# Altium PCB 主控板0415 .PcbDoc (part 2 of 3)
Units mil, origin at the board's own origin, x right, y up, seen from the top; angles counter-clockwise.
Board outline 9048 x 3931 mil, 2 copper layers (Top Layer, Bottom Layer); 421 components, 239 nets, 1182 pads, 360 vias.
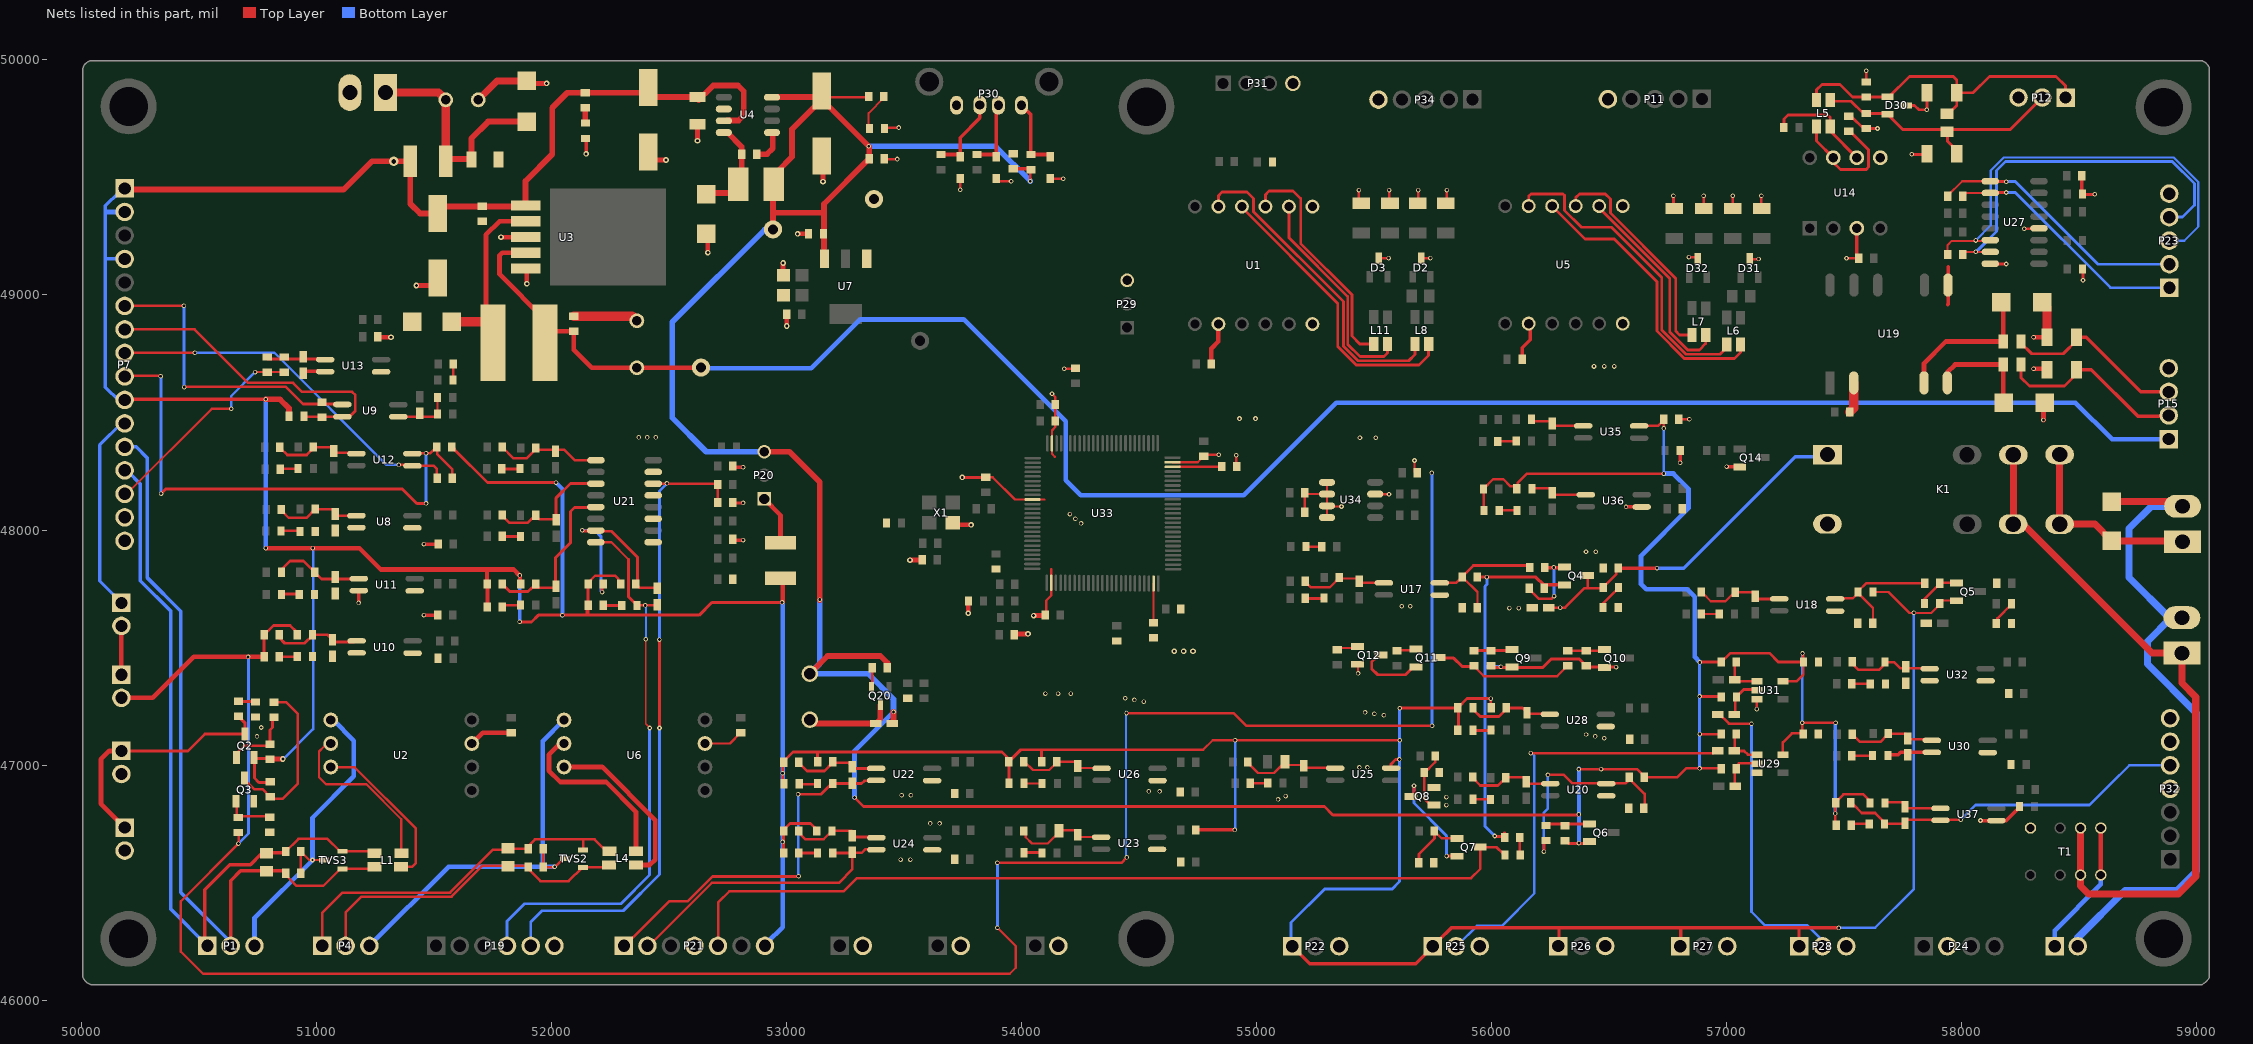
[diagram p2: the nets of this part, all layers, seen from the top]

## Via types
v1: diameter 19, hole 11.81, Top Layer to Bottom Layer, 133 vias
v2: diameter 19, hole 12, Top Layer to Bottom Layer, 130 vias
v3: diameter 20, hole 10, Top Layer to Bottom Layer, 67 vias
v4: diameter 24, hole 12, Top Layer to Bottom Layer, 29 vias
v5: diameter 40, hole 20, Top Layer to Bottom Layer, 1 vias

## Nets (pads, with @x,y where several pads share a name; then routed paths per layer and width w, separated by ;. In a path a pad name is that pad's centre, name@x,y a point inside that pad or via, vN(x,y) a via of type N, cw(c..) or ccw(c..) an arc to the next point about the centre after c; other vN are vias at no path point) (continued)
5V: B1.2 C18.1 C19.2 C24.1 C62.1 C64.1 C87.2 C92.1 C95.2 D111.1 L3.2 P20.3 Q6.2 R15.2 R100.2 R103.1 R165.2 R168.2 R171.2 R174.2 R184.1 R202.2 R204.2 R205.2 R206.2 R208.2 R209.2 TP3.1 U4.4 U7.3 U29.5 U31.5 U35.4 | length 15733.7
  Top Layer w9.94: C18.1@53187,49841 R15.2@53341,49841 ; U31.5@57255,47356 57298,47356 57327,47385 C64.1@57327,47439
  Top Layer w10.94: R205.2@55966,48088 55966,48175 56007,48216 56050,48216 56079,48187 R202.2@56102,48187 ; R202.2@56111,48171 56111,48200 56151,48240 v2(56733,48240) ; v2(56371,46982) 56620,46982 56654,46948 56790,46948 56829,46987 56882,46987 R168.2@56975,46987 ; U35.4@56640,48444 56710,48444 C92.1@56736,48470 ; v2(56733,48432) C92.1@56733,48460 ; v2(56886,47132) R165.2@56972,47132 ; U29.5@57239,47051 57239,47096 57278,47135 57321,47135 57322,47136 v2@57322,47173 ; v2(57322,47180) v2(57464,47180) ; R209.2@57462,46754 R208.2@57462,46846 ; R208.2@57467,46845 57497,46875 57582,46875 57605,46852 R206.2@57605,46846
  Top Layer w11.36: v3(54038,49484) R184.1@54038,49531.5
  Top Layer w11.94: C19.2@53361,49566 C19.2@53361,49569 ; v2(56885,47292) R174.2@56978,47292 ; v2@56889,47439 56979,47439 57016,47476 57182,47476 57220,47438 C64.1@57313,47438
  Top Layer w12.94: v2(53290,46862) 53328,46824 55289,46824 55325,46788 v2@56374,46788 ; R100.2@56327,46667 Q6.2@56407,46667 ; C64.1@57325,47436 v1@57325,47475
  Top Layer w15: C87.2@53965,49537.5 54036.5,49537.5 R184.1@54040.5,49533.5
  Top Layer w23.94: P20.3@52906,48333 53013,48333 53142,48204 v1@53142,47702 ; TP3.1@52943,49279 52943,49350 ; L3.2@52946,49471 52943,49468 52943,49350 ; U4.4@52951,49842 C18.1@53137,49842 ; L3.2@52962,49526 53024,49588 53024,49705 C18.1@53123,49804 ; B1.2@53100,47389 53175,47464 53400,47464 53430,47434 C95.2@53430,47414 ; 53160,49200 53160,49387 C19.2@53348,49575 ; 53160,49352 53158,49350 52943,49350 ; C18.1@53161,49813 53170,49813 53352,49631 C19.2@53352,49576 ; D111.1@53451,47177 53456,47182 v2(53456,47226)
  Bottom Layer w10.94: v2(57322,47180) 57322,47472 v1@57325,47475
  Bottom Layer w11.36: v2(56733,48240) v2(56733,48432)
  Bottom Layer w12.36: v2(56885,46986) v2@56885,47437
  Bottom Layer w15.36: v2(56372,46668) v2@56372,46987 ; v2(57462,46794) v2@57462,47180
  Bottom Layer w20: v2(53290,46862) 53290,47060 v2(53456,47226) ; v2(56733,48240) 56774,48240 56838,48176 56838,48092 56636,47890 56636,47770 56658,47748 56832,47748 56864,47716 56864,47460 56886,47438 v2(56886,47437)
  Bottom Layer w23.94: P20.3@52906,48333 52659,48333 52514,48478 52514,48884 52909,49279 TP3.1@52943,49279 ; v1(53142,47704) 53142,47431 B1.2@53100,47389 53347,47389 53456,47280 v2(53456,47226) ; v3(53350,49632) 53890,49632 v3(54038,49484)
  other v1: 57323,47475
  other v2: 56371,46790 56466,46983
24V_IN: C3.1 C4.1 D1.1 F1.2 P2.1 | length 980.9
  Top Layer w25: C3.1@51550,49828 C3.1@51551,49827 ; F1.2@51552,49578 C4.1@51648,49578 ; C4.1@51660,49576 51660,49666 51731.39,49737.39 D1.1@51896,49737.39
  Top Layer w35: P2.1@51294,49861 51520.1,49861 C3.1@51551.1,49830 ; F1.2@51551,49569 C3.1@51551,49827
485_A: C40.2 D6.1 D30.2 L5.4 P12.2 R62.2 | length 1109.4
  Top Layer w12: L5.4@57441,49829 57446,49824 57530,49824 57582,49772 D30.2@57665.23,49772 ; D30.2@57684.63,49768.6 57749.23,49704 R62.2@57940.24,49704 ; D6.1@57979,49600 57979,49615 57940.24,49653.76 R62.2@57940.24,49704 ; P12.2@58343,49840 58207,49704 R62.2@57940.24,49704
485_B: C36.2 D5.1 D30.1 L5.3 P12.1 R62.1 | length 1435.2
  Top Layer w12: L5.3@57383,49830 57383,49873 57406,49896 57482,49896 57536,49842 C36.2@57594,49842 57683.23,49842 D30.1@57684.63,49843.4 57691.4,49843.4 57778,49930 57964,49930 57979,49915 D5.1@57979,49860 ; R62.1@57940.24,49768 57979,49806.75 D5.1@57979,49860 ; P12.1@58442,49840 58442,49890 58402,49930 58118,49930 58048,49860 D5.1@57979,49860
+12V: C12.2 C13.1 L2.2 P15.1 TP2.1 U3.4 | length 8374.7
  Top Layer w20: U3.4@51891,49179.75 51791.75,49179.75 51780,49168 51780,49088 51973,48895 L2.2@51973,48797 52022,48846 C12.2@52096,48846 52096,48766 52172,48690 C13.1@52364,48690 TP2.1@52636,48690
  Bottom Layer w20: TP2.1@52636,48690 TP2.1@52637,48691 ; TP2.1@52640,48688 53106,48688 53314,48896 53754,48896 54188,48462 54188,48212 54252,48148 54946,48148 55340,48542 58484,48542 58640,48386 58880,48386 P15.1@58881,48387
+24V: C10.1 C11.1 C17.1 C20.1 F1.1 F2.2 P7.1 P7.2 P7.4 P7.10 P21.7 P22.1 P25.1 P26.1 P27.1 P28.1 Q2.2 Q4.2 Q5.2 Q9.2 Q10.2 R1.2 R32.1 R44.1 R51.1 R52.2 R75.1 R77.1 R89.1 R90.1 R113.2 R114.2 R116.2 R117.2 R118.2 R120.2 R121.2 R124.2 R125.1 R127.2 R129.2 R132.2 R134.2 R135.1 R138.2 R140.2 R141.2 R145.2 R148.2 R151.2 R157.2 R158.2 U3.1 U4.7 U25.4 | length 24997.6
  Top Layer w9.94: 54309,47065 54773,47065 54814,47106 v1(54909,47106) v1(55610,47106) ; R89.1@57634,47736 57689,47736 57778,47647 57871,47647 R90.1@57909,47685 ; R90.1@57915,47700 Q5.2@57967,47700
  Top Layer w10.94: R120.2@52156,47684 52156,47775 52187,47806 52270,47806 52285,47791
  Top Layer w11.94: R44.1@51589,48344 51589,48341 51728,48202 v2@52022,48202 ; R127.2@52985,46927 52985,47013 53028,47056 53917,47056 53943,47030 R140.2@53943,47020 ; R134.2@52988,46644 52988,46725 53015,46752 53103,46752 R129.2@53132,46723 ; R121.2@53132,47020 53132,47050 ; R140.2@53946,47014 53997,47065 54035,47065 54309,47065 ; R141.2@53947,46919 R140.2@53947,47026 ; R138.2@54086,47022 54086,47062 ; R148.2@55857,47244 55896,47283 v2(55997,47283) R145.2@55997,47246
  Top Layer w12.36: U25.4@55573,46987 55573,47005 55592,47024 v1(55608,47024) ; v3@56012,46696 R135.1@56055,46696
  Top Layer w12.94: Q2.2@50737,47021 50737,46945 50756,46926 R51.1@50803,46926 ; Q2.2@50738,47028 R52.2@50795,47028 ; v2@51868,47609 51916,47609 51945,47638 52629,47638 52683,47692 v1@52978,47692 ; v1@55613,47242 R148.2@55848,47242 ; R151.2@55859,47152 R148.2@55859,47229 ; R157.2@56016,47416 56219,47416 56255,47452 56372,47452 56407,47417 v1(56530,47417) ; P26.1@56287,46233 56287,46307 ; P27.1@56805,46249 56805,46303 ; P28.1@57309,46237 57309,46302
  Top Layer w13.94: P7.10@50178,48556 v1(50785,48556) ; P22.1@55170,46212 55227,46155 55678,46155 P25.1@55762,46239 ; R75.1@55955,47800 56189,47800 56222,47767 Q4.2@56298,47767
  Top Layer w14.94: P25.1@55776,46255 55828,46307 56287,46307 v1(57477,46307)
  Top Layer w15: R125.1@54742,46724 v1(54908,46724)
  Top Layer w15.75: 52154,47644 R120.2@52154,47681
  Top Layer w16.94: 51720,47832 51727,47825 R114.2@51727,47770 ; R116.2@51728,47688 R114.2@51728,47762 ; R113.2@51866,47789 v2@51866,47806
  Top Layer w20: v1@50788,47922 51184,47922 51274,47832 51840,47832 v2@51866,47806 ; R52.2@50810.5,47026 v4(50858,47026) ; F2.2@52975,47795 F2.2@52980,47790 ; v1@52984,47694 F2.2@52984,47792
  Top Layer w23.94: v1(50785,48556) 50846,48556 50884,48518 R32.1@50884,48484 ; R1.2@52144,49860 52407,49860 C20.1@52438,49829 ; C20.1@52439,49842 C17.1@52628,49842 ; C17.1@52627,49829 52675,49877 52689,49891 52794,49891 52818,49867 52818,49763 52797,49742 U4.7@52748,49742
  Top Layer w25: P7.1@50188,49448 51116,49448 51237,49569 F1.1@51400,49569 51400,49388 51441,49347 C11.1@51517,49347 ; C11.1@51537,49376 U3.1@51876,49376 ; U3.1@51891,49380 51891,49485 52004,49598 52004,49796 52068,49860 R1.2@52144,49860
  Bottom Layer w10.36: v1@57477,46305 v1(57477,46307) ; v1@57478,46308 57632,46308 57797,46473 v2(57797,47648)
  Bottom Layer w11.36: v4@50860,47026 50987,47153 v1@50987,47924 ; v1@54909,46722 v1(54909,47106)
  Bottom Layer w12.36: P22.1@55147,46254 55147,46330 55289,46472 55576,46472 55609,46505 v1@55609,47239
  Bottom Layer w13.36: 55975,47283 v2@55999,47283 ; v1(55980,47800) 55980,47768 55972,47760 55972,47418 ; v3@56016,46696 55972,46740 55972,47418 ; v2@56034,47418 55972,47418
  Bottom Layer w14.36: 50107,49154 P7.4@50186,49154 ; P7.10@50161,48550 50103,48608 50103,49379 P7.1@50161,49437
  Bottom Layer w16.36: v2@51866,47612 v2(51866,47807) ; v2@52022,48200 52047,48175 v2(52047,47637)
  Bottom Layer w19.36: 50110,49353 P7.2@50173,49353
  Bottom Layer w20: v1@50785,47924 v1@50785,48558 ; P21.7@52919,46246 52984,46311 v1@52984,47690
  other v1: 55610,47242 52982,47692 50785,47923 50985,47923
  other v2: 52984,46673 52984,46965 56040,47418 51865,47610 52020,48202
  other v3: 56014,46698
  other v5: 51330,49568
+24V_M: K1.3 K1.6 P6.1 T1.3 T1.6 | length 2996
  Top Layer w30: K1.3@58220,48320 58220,48026 K1.6@58219,48025 58261,48025 58810,47476 P6.1@58937,47476 58937,47349 58996,47290 58996,46526 58922,46452 58540,46452 58506,46486 T1.3@58506,46732
A+: P23.1 R146.1 U27.2 | length 1035.9
  Top Layer w9.36: R146.1@58005,49412 58005,49419 58019.86,49433.86 U27.2@58122,49433.86
  Top Layer w12: U27.2@58136,49436 v3@58184,49436
  Bottom Layer w12: v3@58194,49436 58228,49436 58633,49031 P23.1@58884,49031
  other v3: 58190,49436
A-: P23.2 R146.2 U27.1 | length 1100.4
  Top Layer w9.36: R146.2@57941,49412 57941,49423 58002,49484 U27.1@58122,49484
  Top Layer w12: U27.1@58146,49482 v3@58194,49482
  Bottom Layer w12: v3@58194,49482 58228,49482 58579,49131 P23.2@58883.75,49131
  other v3: 58190,49482
AGND_M: D47.2 P6.2 P13.2 P14.2 | length 2993.6
  Top Layer w30: D47.2@58638,48121 58920,48121 P13.2@58940,48101
  Bottom Layer w30: P14.2@58494,46229 58494,46265.44 58694.56,46466 58916,46466 59000,46550 59000,47220 58790,47430 58790,47526 58891,47627 P6.2@58937,47627 58883,47627 58712,47798 58712,48006 58807,48101 P13.2@58940,48101
B+: P23.3 R152.2 U27.6 | length 1841.9
  Top Layer w9.36: R152.2@57941,49172 57940,49173 57940,49212 57958,49230 57986,49230 58118.71,49230 U27.6@58122,49233.29
  Bottom Layer w9.36: v3(58060,49232) 58124,49296 58124,49529.59 58179.09,49584.68 58902.91,49584.68 59006.68,49480.91 59006.68,49290.68 58947,49231 P23.3@58883.5,49231
B-: P23.4 R152.1 U27.7 | length 1621.8
  Top Layer w9.36: R152.1@58005,49172 58016.14,49183.14 U27.7@58122,49183.14
  Bottom Layer w12: v3(58060,49184) 58062,49184 58148,49270 58148,49530 58186,49568 58896,49568 58990,49474 58990,49382 58939,49331 P23.4@58883.25,49331
BELL: C33.2 P7.9 R44.2 U12.4 | length 2238.6
  Top Layer w10.94: P7.9@50195,48656 v2@50336,48656 ; U12.4@51430,48326 51484,48326 51503,48345 R44.2@51513,48345 ; R44.2@51514,48342 51514,48323 51578,48259 C33.2@51578,48235
  Top Layer w12.94: v1(50340,48155) 50359,48174 51367,48174 51428,48113 v1(51467,48113)
  Bottom Layer w12.36: v1(51467,48113) v1(51467,48327)
  Bottom Layer w13.36: v2@50335,48652 50340,48647 v1(50340,48155)
  other v2: 50338,48654
"BELL COM": C33.1 P7.8 U12.3 | length 1499
  Top Layer w9.94: P7.8@50201,48754 v1(50484,48754)
  Top Layer w10.94: v1(51351,48277) U12.3@51401,48277 ; U12.3@51446,48273 51500,48273 51513,48260 C33.1@51513,48231
  Bottom Layer w9.94: v1(50484,48754) 50822,48754 51299,48277 v1(51351,48277)
"CAN1 H": C6.1 L1.1 P1.2 P7.12 R8.1 TVS3.1 | length 3295.9
  Top Layer w10: C6.1@50870,46540 50870,46532 50916,46486 51030,46486 51102.6,46558.6 TVS3.1@51110.99,46558.6 51239.6,46558.6 L1.1@51248,46567
  Top Layer w15: P1.2@50636,46231 50636,46508 50678,46550 50786,46550 R8.1@50792,46556 ; R8.1@50798,46550 C6.1@50864,46550
  Bottom Layer w15: P7.12@50185,48353.73 50234.27,48353.73 50282,48306 50282,47796 50424,47654 50424,46458 50636,46246 P1.2@50636,46231
"CAN1 L": C9.1 L1.2 P1.1 P7.13 R8.2 TVS3.2 | length 3183.2
  Top Layer w10: C9.1@50870,46632 50924,46686 51048,46686 51100.6,46633.4 TVS3.2@51110.99,46633.4 51239.6,46633.4 L1.2@51248,46625
  Top Layer w15: P1.1@50526,46266 50526,46470 50632,46576 50720,46576 50764,46620 R8.2@50792,46620 ; R8.2@50802,46626 C9.1@50868,46626
  Bottom Layer w15: P7.13@50198,48250 50252,48196 50252,47784 50382,47654 50382,46386 P1.1@50537,46231
"CAN2 H": C22.1 L4.3 P4.2 R20.2 TVS2.1 | length 1391.4
  Top Layer w10.94: P4.2@51125,46231 51125,46372 51193,46440 51575.95,46440 51707.95,46572 R20.2@51820,46572 ; R20.2@51834,46572 51896,46572 C22.1@51902,46566 51902,46558 51954,46506 52074,46506 52132.6,46564.6 TVS2.1@52134.99,46564.6 52235.6,46564.6 L4.3@52246,46575
"CAN2 L": C27.1 L4.4 P4.1 R20.1 TVS2.2 | length 1556.6
  Top Layer w10.94: P4.1@51026,46231 51026,46372 51110.94,46456.94 51568.94,46456.94 51752,46640 51816,46640 R20.1@51822,46634 ; R20.1@51834,46636 51842,46644 C27.1@51902,46644 51902,46656 51930,46684 52184,46684 52228.6,46639.4 52240.6,46639.4 L4.4@52247,46633 ; TVS2.2@52134.99,46639.4 52134.99,46682.99 52136,46684
CANG_1: C6.2 C9.2 P1.3 TVS3.3 U2.8 | length 1388.6
  Top Layer w10: C6.2@50934,46540 C9.2@50934,46632 50970,46596 TVS3.3@51033.01,46596
  Bottom Layer w20: P1.3@50737,46231 50737,46349 v3(50984,46596) 50984,46776 51160,46952 51160,47104 51072,47192 U2.8@51062,47192
CANG_2: C22.2 C27.2 P4.3 TVS2.3 U6.8 | length 1786.8
  Top Layer w10.94: C27.2@51966,46644 C22.2@51966,46566 52016,46566 52052,46602 TVS2.3@52057.01,46602
  Bottom Layer w20: P4.3@51226,46231 51563,46568 51964,46568 51964,47102 U6.8@52054,47192 ; 51950,46568 v3(52014,46568)
EMC-: P7.11 P8.1 | length 835.7
  Bottom Layer w13.36: P8.1@50164,47698 50079,47783 50079,48362 50172,48455 P7.11@50177,48455
EXPOSE: D81.2 P21.5 Q7.3 | length 3656
  Top Layer w10.94: P21.5@52711,46258 52711,46417 52757,46463 53244,46463 53300,46519 55913,46519 55952,46558 Q7.3@55952,46651
  Top Layer w11.94: Q7.3@55953,46654 55957,46650 56022,46650 D81.2@56046,46626
FAULT: D78.2 D79.2 P21.2 U24.2 | length 1250.9
  Top Layer w10.94: P21.2@52403,46227 52410.61,46227 52682.61,46499 53223,46499 53281,46557 D78.2@53281,46622 ; D79.2@53197,46626 53281,46626 53282,46627 53321,46627 53335,46641 U24.2@53362,46641
FAULT1: C30.2 P7.7 R32.2 U9.4 | length 1377.7
  Top Layer w10.94: P7.7@50201,48854 50482,48854 50710,48626 50902,48626 50940,48588 51152,48588 51166,48574
  Top Layer w12: R32.2@50948,48484 50950,48482 U9.4@51111,48482 51142,48482 51166,48506 51166,48574
"FAULT1 COM": C30.1 P7.6 U9.3 | length 1284.2
  Top Layer w10.94: P7.6@50187,48954 v1(50437,48954) ; v1@50438,48609 50871,48609 50944,48536 U9.3@51094,48536
  Bottom Layer w12.36: v1(50438,48608) v1@50438,48956
FDP_ENABLE: D106.2 D107.2 P32.5 R208.1 U37.2 | length 1482.6
  Top Layer w10.94: R208.1@57539,46832 57575,46796 57632,46796 57677,46751 D106.2@57751,46751 ; D106.2@57758,46767 57899,46767 57976,46767 ; v1@57989,46767 57976,46767 ; v1@57995,46767 57976,46767
  Bottom Layer w10.94: v1(57996,46767) 58059,46830 58544,46830 58634,46920 58713,46999 P32.5@58887,46999
FLOOUT: D72.2 D73.2 P19.4 U21.8 | length 2385
  Top Layer w7.36: v2(52402,47535) 52402,47175 v3(52419,47158)
  Top Layer w8.94: U21.8@52209,47948 52256,47948 52328,47876
  Top Layer w11.94: 52328,47876 52328,47716 52364,47680 D73.2@52443,47680
  Bottom Layer w7.36: v2@52403,47536 v2@52403,47682
  Bottom Layer w12: P19.4@51811.8,46231 51811.8,46335.8 51886,46410 52296,46410 52418,46532 v3@52418,47156
  other v2: 52400,47679
FLOSY: C53.2 P19.5 R110.2 U21.14 | length 2756.4
  Top Layer w10.36: U21.14@52450,48196 R110.2@52717,48196 ; C53.2@52708,48122 R110.2@52708,48205
  Top Layer w12: v2@52458,47532 52460,47530 v3(52460,47158)
  Bottom Layer w12: P19.5@51912.4,46231 51912.4,46332 51960.4,46380 52306,46380 52460,46534 v3@52460,47156 ; v2(52460,47534) 52460,48166 v2(52492,48198)
FOREWARD: D89.1 P25.2 | length 1798.3
  Top Layer w10.94: v2@56169,47050 D89.1@56943,47050
  Bottom Layer w10.36: P25.2@55856,46234 55938,46316 56044,46316 56182,46454 56182,47040 v2@56167,47055
  other v2: 56167,47051
FPD_BOTT: D94.1 P28.2 | length 1343.6
  Top Layer w10.94: D94.1@56959,47222 56964,47222 57010,47176 v1(57106,47176)
  Bottom Layer w10.94: v1(57106,47176) 57106,46556 57106,46376 57164,46318 57344,46318 57408,46254 P28.2@57408,46229
GND: C1.2 C2.1 C3.2 C4.2 C5.2 C7.1 C8.1 C10.2 C11.2 C12.1 C13.2 C15.2 C17.2 C18.2 C19.1 C20.2 C24.2 C25.1 C29.1 C31.1 C32.1 C34.2 C35.2 C37.1 C41.1 C46.1 C47.1 C48.1 C50.1 C51.1 C52.1 C53.1 C54.1 C55.1 C56.1 C57.1 C58.1 C59.1 C60.2 C61.1 C62.2 C63.1 C64.2 C65.1 C66.2 C67.2 C69.2 C75.1 C80.1 C81.1 C82.2 C83.1 C84.1 C85.1 C86.1 C87.1 C88.2 C90.2 C91.2 C92.2 C93.1 C94.1 C95.1 D1.2 D4.2 D8.2 D9.2 D10.2 D16.2 D18.2 D19.2 D21.2 D22.2 D24.2 D25.2 D28.2 D35.1 D36.1 D46.2 D48.2 D56.2 D58.2 D61.1 D63.1 D95.2 D96.2 D99.2 D100.2 D101.2 K1.8 L9.1 P2.2 P7.15 P7.16 P9.2 P10.2 P15.4 P16.2 P17.2 P18.2 P19.6 P21.4 P22.3 P23.5 P24.2 P25.3 P26.3 P27.3 P28.3 P29.3 P30.1 P31.4 P32.4 P32.6 P32.7 Q3.2 Q8.2 Q12.2 Q14.2 Q20.2 R55.2 R142.1 R144.1 R147.1 R154.1 R179.2 R181.2 R193.1 R194.2 R199.1 T1.1 TP5.1 U1.2 U1.6 U2.2 U3.3 U3.5 U4.6 U5.2 U5.6 U6.2 U7.1 U8.2 U8.3 U10.2 U10.3 U11.2 U11.3 U13.2 U13.3 U14.3 U17.3 U18.3 U19.2 U19.5 U20.3 U21.9 U21.11 U21.13 U21.15 U22.3 U23.3 U24.3 U26.3 U27.8 U27.12 U28.3 U29.3 U30.3 U31.3 U32.2 U32.3 U33.10 U33.27 U33.74 U33.99 U34.1 U34.2 U34.3 U34.4 U34.7 U36.3 U37.3 X1.2 | length 5940.5
  Top Layer w9.36: C67.2@54792,48320 v3(54840,48320) ; C82.2@54914,48270 v3(54914,48318) ; U34.3@55314,48100 v3(55362,48100) ; U34.7@55516,48152 v3(55564,48152) ; C88.2@55672,48248 v3(55672,48296)
  Top Layer w9.94: v2@55432,47392 Q12.2@55432,47430
  Top Layer w10: U6.2@52654,47092 52760,47092 C15.2@52806,47138 ; Q20.2@53362.6,47332.99 53366,47336.39 C95.1@53366,47414 ; v4@53748,48222 v4@53750,48224 ; C81.1@53852,48224 53878,48224 53972.21,48129.79 U33.10@54047.25,48129.79 54097.79,48129.79 54098,48130 ; C86.1@54106,47642 54106,47700 54127.22,47721.22 U33.27@54127.22,47775.64 54127.22,47832.78 54126,47834 ; v3(54130,48580) 54144,48566 C66.2@54144,48534 C66.2@54150,48528 ; 54142,48312 54129.84,48324.16 U33.99@54129.84,48368.41 54129.84,48423.84 54144,48438 C69.2@54144,48478 ; C69.2@54144,48480 C66.2@54144,48524 ; v3(54182,48686) 54228,48686 R179.2@54230,48688 ; U33.74@54642.84,48288.44 54750.44,48288.44 C67.2@54776,48314 ; C91.2@55205,48076 55206,48077 C90.2@55206,48158 55211,48153 U34.2@55300,48153 ; U34.4@55300,48053 U34.1@55300,48203
  Top Layer w10.94: C92.2@56810,48472 v2@56838,48472 ; v2@57128,47245 U31.3@57128,47282
  Top Layer w11.36: C19.1@53424.5,49578 v3(53472,49578) ; D9.2@53430.5,49712 v3(53478,49712) ; v3(53740,49448) D101.2@53740,49495.5 ; 53908.5,49484 v3(53956,49484) ; D99.2@54130.5,49494 v3(54178,49494)
  Top Layer w12: v4@53750,48224 C81.1@53848,48224 ; v3@57508,49156 C35.2@57556,49156 ; U27.8@58144,49132 v3@58192,49132 ; v3@58264,49282 U27.12@58312,49282 ; v3@58516,49060 R154.1@58516,49108 ; R147.1@58518,49428 v3(58566,49428)
  Top Layer w14.36: C54.1@52784,47957 v2(52816,47957) ; C53.1@52784,48115 v2(52816,48115) ; C52.1@52784,48267 v2(52816,48267)
  Top Layer w15: D25.2@50950,48676 U13.2@51036,48676 ; v1(51180,47690) U11.2@51180,47745 ; v1(51458,47638) C32.1@51513,47638 ; v1(51458,47940) C29.1@51513,47940 ; D4.2@52146,49666 52148,49664 v4(52148,49600) ; C37.1@56130,48726 56130,48776 56164,48810 56164,48872 U5.2@56158,48878 ; v1(56572,48098) 56627,48098 U36.3@56628,48097 ; v1(56802,48286) R199.1@56802,48341 ; v1(57000,48270) 57055,48270 Q14.2@57056,48269 ; U14.3@57554,49284 57554,49164 C35.2@57562,49156 ; 57940,48958 57942,48960 U19.5@57942,49042 57942,49120 ; v3@58080,46762 58082,46764 U37.3@58148,46764 58190,46764 58246,46820 C94.1@58246,46824 ; C60.2@58511,49507 58511,49433 R147.1@58514,49430
  Top Layer w20: C34.2@51270.5,48820 v4(51318,48820) ; v4(51426,49040) C11.2@51488,49040 ; U2.2@51662,47092 51708,47138 C1.2@51830,47138 ; v4(51786,49246) U3.3@51833.5,49246 ; v4(51896,49048) U3.5@51896,49095.5 ; D1.2@51932.5,49900 v4(51980,49900) ; C20.2@52440.5,49574 v4(52488,49574) ; v4(52622,49656) 52622,49703.5 ; v4(52666,49180) D10.2@52666,49227.5 ; C7.1@52986,49088.5 v4(52986,49136) ; v4(53002,48868) C25.1@53002,48915.5 ; v4(53048,49260) C24.2@53095.5,49260 ; v4(53156,49482) C18.2@53156,49529.5 ; v4(53526,47872) C83.1@53573.5,47872 ; X1.2@53738.5,48022 v4(53786,48022) ; v4(53774,47646) L9.1@53774,47693.5 ; C75.1@53980.5,47558 v4(54028,47558) ; v4(54052,47636) C86.1@54099.5,47636 ; C2.1@54808,48706 54808,48772 54838,48802 U1.2@54838,48876 ; v2(58306,48686) D36.1@58359,48686 ; v2(58306,48820) D35.1@58359,48820 ; v2(58348,48468) D63.1@58348,48521
  Top Layer w30: C3.2@51688.9,49830 51769.51,49910.61 D1.2@51896,49910.61
  Top Layer w40: C12.1@52096,48910 52344,48910 C13.2@52364,48890 ; C48.1@57524,48502 57541,48519 U19.2@57541,48626 ; D61.1@58342.61,48968 58363,48947.61 D35.1@58363,48820 ; D36.1@58359,48686 D36.1@58363,48682
  other v1: 53486,46598 53528,46598 53612,46752 53652,46752 55808,46830 55092,46854 55808,46864 55124,46868 53490,46872 53530,46872 54542,46888 54588,46888 55438,46990 55472,46990 56480,47114 50748,47122 56441,47122 56402,47130 55542,47212 55502,47218 55462,47224 54520,47270 54481,47277 54442,47284 54102,47304 54156,47304 54210,47304 56076,47668 56116,47668 55618,47676 55654,47676 52372,48394 52408,48394 52444,48394
  other v2: 57128,47238 55432,47390 54254,48028 54230,48048 54206,48068 56842,48471
  other v3: 58080,46764 50766,47160 56402,47908 56444,47908 55440,48392 55508,48392 54928,48474 54996,48474 56436,48696 56479,48696 56522,48696 58516,49062 58190,49132 57510,49156 58266,49282
  other v4: 54650,47484 54690,47484 54730,47484 53748,48224
GND_422_1: D15.2 D29.2 D31.3 D32.3 D33.2 D34.2 P11.5 U5.7 | length 208
  Top Layer w10.94: D29.2@56774,49386 v2@56774,49424 ; v2(56840,49161) D32.3@56868,49161 ; D15.2@56902,49384 v2(56902,49422) ; D33.2@57026,49380 v2@57026,49418 ; D31.3@57104,49152 v2@57132,49152 ; D34.2@57148,49382 v2@57148,49420
  other v2: 57136,49153 56774,49422 57026,49422 57148,49422
GND_422_2: D2.3 D3.3 D7.2 D11.2 D12.2 D14.2 P34.5 U1.7 | length 208
  Top Layer w10.94: D11.2@55436,49410 v2@55436,49448 ; 55534,49157 v2(55562,49157) ; D7.2@55564,49408 v2(55564,49446) ; D12.2@55688,49404 v2@55688,49442 ; D2.3@55712,49157 v2(55740,49157) ; D14.2@55810,49406 v2@55810,49444
  other v2: 55436,49446 55688,49446 55810,49446
GND_485: C36.1 C40.1 D5.2 D6.2 D30.3 P12.3 R67.2 U14.5 | length 382
  Top Layer w12: R67.2@57520,49756 57534,49756 57582,49708 C40.1@57594,49708 v3(57642,49708) ; C36.1@57594,49906 v3(57594,49954) ; D30.3@57763.37,49806 57800,49806 57818,49788 v3(57852,49788) D5.2@57852,49836 ; v3(57788,49598) D6.2@57836,49598
HAND_PRE: P7.14 R43.1 R48.1 | length 915.3
  Top Layer w9.94: P7.14@50185,48153.87 50193.87,48153.87 50556,48516 v1(50638,48516) ; v1(50740,48672) R48.1@50782,48672 ; R48.1@50792,48672 R43.1@50864,48672
  Bottom Layer w9.94: v1(50638,48516) 50638,48570 v1(50740,48672)
KV85: D74.2 D76.2 P21.1 U22.2 | length 1542.5
  Top Layer w10.94: P21.1@52336,46241 52336,46255 52501,46420 52579.66,46420 52685.66,46526 v2@53051,46526
  Top Layer w11.94: v2(53050,46876) 53148,46876 D76.2@53197,46925 ; D76.2@53193,46921 53320,46921 53332,46933 U22.2@53375,46933
  Bottom Layer w11.36: v2@53050,46529 v2(53050,46876)
  other v2: 53052,46527
LCD_RX: D35.2 P15.3 R97.1 | length 786.9
  Top Layer w12: R97.1@58252,48802 58252,48796 58298,48750 58432,48750 58489,48807 D35.2@58489,48820
  Top Layer w15: D35.2@58489,48820 58530,48820 58762.33,48587.67 P15.3@58881,48587.67
LCD_TX: D36.2 P15.2 R98.1 | length 823.4
  Top Layer w12: R98.1@58252,48704 58252,48648 58288,48612 58438,48612 58489,48663 D36.2@58489,48682
  Top Layer w15: D36.2@58489,48682 58552,48682 58750,48484 58877.67,48484 P15.2@58881,48487.33
NetB1_1: B1.1 D111.2 Q20.3 | length 373.5
  Top Layer w23.94: B1.1@53100,47193 53116,47177 D111.2@53381,47177 53400,47196 Q20.3@53400,47255.01
NetC14_1: C14.1 U4.1 | length 134.9
  Top Layer w23.94: C14.1@52878,49599 52918,49599 52942,49623 U4.1@52942,49684
NetC14_2: C14.2 D10.1 L3.1 U4.8 | length 365.5
  Top Layer w23.94: D10.1@52682,49434 L3.1@52781,49434 ; U4.8@52734,49691 52749,49691 52810,49630 52810,49486 L3.1@52795,49471
NetC41_2: C41.2 R75.2 R78.2 U17.4 | length 525.7
  Top Layer w10: R75.2@55881,47795 55940,47736 C41.2@55940,47680
  Top Layer w10.94: U17.4@55808,47776 55850,47776 55923,47849 R78.2@56164,47849
NetC46_2: C46.2 D46.1 K1.1 Q4.3 R83.2 | length 1472.3
  Top Layer w10.94: D46.1@56258,47670 56313,47670 56396,47753 56410,47753 ; Q4.3@56409,47806 56410,47805 56410,47753 ; R83.2@56466,47753 56410,47753 ; R83.2@56475,47768 56486,47768 56531,47813 C46.2@56531,47826
  Top Layer w15: C46.2@56539,47838 56700,47838 v1@56702,47840
  Bottom Layer w15: v1(56704,47838) 56818,47838 57292,48312 57420,48312 K1.1@57429,48321
  other v1: 56292,47670
NetC47_2: C47.2 R89.2 R93.2 U18.4 | length 509.1
  Top Layer w9.94: U18.4@57489,47709 57537,47709 57562,47734 57562,47742 57593,47773 R93.2@57842,47773 ; R89.2@57569,47721 57570,47721 57623,47668 C47.2@57623,47619
NetC51_2: C51.2 R101.2 R103.2 U20.4 | length 881.2
  Top Layer w10.94: v2@56244,46959 56307,46959 56344,46922 56571,46922 R103.2@56586,46937 ; R103.2@56594,46944 56594,46934 56651,46877 C51.2@56651,46823
  Top Layer w12.94: v2(56223,46632) R101.2@56223,46672
  Bottom Layer w10.36: v2(56223,46632) 56223,46798 56240,46815 v2(56240,46958)
NetC82_1: C82.1 U33.73 | length 179
  Top Layer w9.36: U33.73@54673,48269 C82.1@54852,48269
NetC84_2: C84.2 U33.49 | length 172
  Top Layer w10: U33.49@54562.15,47772.4 54562.15,47605.85 C84.2@54566,47602
NetD4_1: D4.1 R1.1 | length 65.8
  Top Layer w23.94: R1.1@52144,49796 52144,49733 D4.1@52146,49731
NetD8_1: D8.1 L2.1 U3.2 | length 724
  Top Layer w20: L2.1@51722,48956 51722,49256 51780,49314 U3.2@51858,49314
  Top Layer w40: D8.1@51576,48886 51751,48886 L2.1@51751,48797
NetD9_1: D9.1 R15.1 | length 140.5
  Top Layer w7.94: D9.1@53350,49724 53350,49774 R15.1@53414,49838
NetD16_1: D16.1 R27.1 R31.1 U8.1 | length 341.5
  Top Layer w10.94: R31.1@50858,48077 50883,48052 50958,48052 R27.1@50995,48089 51062,48089 ; 51060,48089 51067,48089 D16.1@51081,48075 ; D16.1@51078,48071 51078,48060 U8.1@51152,48060
NetD17_1: D17.1 R113.1 R114.1 U21.5 | length 670.5
  Top Layer w11.94: R114.1@51798,47763 51823,47738 51901,47738 51917,47754 D17.1@52010,47754 ; D17.1@52018,47760 52018,47882 52082,47946 52082,48079 52099,48096 U21.5@52171,48096
NetD18_1: D18.1 R29.1 R35.1 U10.1 | length 370.9
  Top Layer w11.94: R35.1@50843,47557 50843,47541 50866,47518 50950,47518 50986,47554 51048,47554 51078,47524 U10.1@51161,47524
NetD19_1: D19.1 R36.1 | length 56
  Top Layer w10.94: 50866,47997 D19.1@50922,47997
NetD20_1: D20.1 R37.1 | length 68.4
  Top Layer w10: D20.1@51582,48638 51583,48639 R37.1@51583,48706
NetD21_1: D21.1 R38.1 | length 72
  Top Layer w11.94: R38.1@50847,47461 D21.1@50919,47461
NetD22_1: D22.1 R39.1 R42.1 U11.1 | length 356.9
  Top Layer w11.94: R42.1@50858,47838 50888,47868 50946,47868 51022,47792 U11.1@51171,47792
NetD23_1: D23.1 R40.1 R45.1 U12.1 | length 329.3
  Top Layer w10.94: R45.1@50849,48347 50877,48319 50959,48319 50992,48352 D23.1@51070,48352 ; D23.1@51077,48328 U12.1@51160,48328
NetD24_1: D24.1 R47.1 | length 67
  Top Layer w11.94: R47.1@50864,47728 D24.1@50931,47728
NetD25_1: D25.1 R43.2 R48.2 U13.1 | length 248.1
  Top Layer w12: R48.2@50792,48730 50794,48728 51035,48728 U13.1@51038,48725
NetD26_1: D26.1 R49.1 | length 68
  Top Layer w10.94: R49.1@50855,48261 D26.1@50923,48261
NetD28_1: D28.1 R56.1 | length 73.8
  Top Layer w11.94: R56.1@50669,47271 50740,47271 D28.1@50742,47269
NetD40_1: D40.1 R71.1 R74.1 U17.1 | length 348.8
  Top Layer w9.94: R74.1@55211,47777 55232,47756 55312,47756 R71.1@55358,47802 ; R71.1@55356,47794 D40.1@55430,47794 ; D40.1@55440,47776 U17.1@55540,47776
NetD41_1: D41.1 R76.1 | length 75
  Top Layer w11.94: R76.1@55215,47709 D41.1@55290,47709
NetD47_1: D47.1 K1.4 K1.5 P13.1 | length 850.1
  Top Layer w30: K1.4@58417,48321 K1.5@58417,48025 58567,48025 D47.1@58638,47954 58936,47954 P13.1@58940,47950
NetD48_1: D48.1 R83.1 | length 105.8
  Top Layer w10.94: D48.1@56475,47677 56475,47688 R83.1@56542,47755
NetD54_1: D54.1 R86.1 R88.1 U18.1 | length 306.7
  Top Layer w9.94: R88.1@56897,47733 56933,47697 56995,47697 57033,47735 D54.1@57111,47735
  Top Layer w11.94: D54.1@57134,47707 U18.1@57196,47707
NetD57_1: D57.1 R92.1 | length 67
  Top Layer w9.94: R92.1@56900,47643 D57.1@56967,47643
NetD58_1: D58.1 R95.1 | length 103.9
  Top Layer w9.94: D58.1@58152,47605 58152,47624 R95.1@58212,47684
NetD61_2: D61.2 R97.2 U19.3 | length 628.3
  Top Layer w20: U19.3@57840,48626 57840,48710 57932,48802 R97.2@58177,48802 58177,48960.39 D61.2@58169.39,48968
NetD63_2: D63.2 R98.2 U19.4 | length 459.7
  Top Layer w20: U19.4@57939,48626 57939,48671 57972,48704 R98.2@58177,48704 58177,48544.39 D63.2@58179.39,48542
NetD64_1: D64.1 R99.1 R102.1 U20.1 | length 319.5
  Top Layer w10.94: R102.1@55923,46942 55952,46913 56027,46913 56062,46948 D64.1@56137,46948 ; D64.1@56149,46920 U20.1@56228,46920
NetD65_1: D65.1 R104.1 | length 59
  Top Layer w10.94: R104.1@55930,46855 D65.1@55989,46855
NetD66_1: D66.1 R108.1 | length 66
  Top Layer w11.94: R108.1@51794,48260 D66.1@51860,48260
NetD67_1: D67.1 R106.1 R107.1 U21.1 | length 432.8
  Top Layer w10.94: R107.1@51794,48350 51838,48306 51896,48306 51932,48342 52054,48342 52099,48297 U21.1@52175,48297
NetD68_1: D68.1 R112.1 | length 61
  Top Layer w11.94: R112.1@51800,47972 D68.1@51861,47972
NetD69_1: D69.1 R109.1 R111.1 U21.3 | length 541.4
  Top Layer w10.94: R111.1@51789,48063 51821,48031 51900,48031 51928,48059 51935,48059 51948,48046 D69.1@52024,48046
  Top Layer w12.94: D69.1@52024,48046 52019,48051 52019,48111 52019,48135 52082,48198 U21.3@52178,48198
NetD70_1: D70.1 R116.1 | length 65
  Top Layer w11.94: R116.1@51804,47680 D70.1@51869,47680
NetD72_1: D72.1 R120.1 | length 60
  Top Layer w10.94: R120.1@52230,47679 D72.1@52290,47679
NetD73_1: D73.1 R117.1 R118.1 U21.7 | length 811.5
  Top Layer w11.94: v2@52132,48000 52136,47996 U21.7@52172,47996 ; U21.7@52197,47995 52256,47995 52367,47884 52367,47764 52377,47754 D73.1@52448,47754 ; v2(52216,47736) R118.1@52216,47764
  Bottom Layer w13.36: v2@52136,47998 52186,47998 52212,47972 v2@52212,47738
  other v2: 52131.28,47998.72
NetD74_1: D74.1 R121.1 R124.1 U22.1 | length 372.2
  Top Layer w11.94: R124.1@53050,47013 53088,46975 53162,46975 53197,47010 53264,47010 53288,46986 U22.1@53382,46986
NetD75_1: D75.1 R122.2 R126.1 U23.1 | length 309
  Top Layer w9.94: R126.1@54018,46711 54018,46693 54045,46666 54112,46666 R122.2@54143,46697 ; R122.2@54160,46722 D75.1@54232,46722 ; D75.1@54248,46694 U23.1@54318,46694
NetD76_1: D76.1 R127.1 | length 80
  Top Layer w11.94: R127.1@53055,46918 D76.1@53135,46918
NetD77_1: D77.1 R128.1 | length 67
  Top Layer w11.94: R128.1@54014,46628 D77.1@54081,46628
NetD78_1: D78.1 R129.1 R132.1 U24.1 | length 322.6
  Top Layer w10.94: R132.1@53058,46707 53080,46685 53159,46685 53194,46720 D78.1@53277,46720 ; D78.1@53285,46694 U24.1@53365,46694
NetD79_1: D79.1 R134.1 | length 54
  Top Layer w10.94: R134.1@53064,46626 D79.1@53118,46626
NetD80_1: D80.1 R131.2 R133.1 U25.1 | length 396.9
  Top Layer w9.94: R133.1@54974,47009 54974,46998 55006,46966 55075,46966 55109,47000 55190,47000 55201,46989 U25.1@55328,46989
NetD81_1: D81.1 R135.2 | length 89
  Top Layer w10.94: D81.1@56120,46614 56120,46665 ; 56120,46664 R135.2@56120,46702
NetD82_1: D82.1 R136.1 | length 75
  Top Layer w9.94: R136.1@54973,46923 D82.1@55048,46923
NetD83_1: D83.1 R138.1 R140.1 U26.1 | length 311
  Top Layer w8.94: R140.1@54014,47014 54049,46979 54118,46979 54153,47014 D83.1@54230,47014 ; D83.1@54248,46987 U26.1@54314,46987
NetD84_1: D84.1 R141.1 | length 68
  Top Layer w8.94: R141.1@54020,46921 D84.1@54088,46921
NetD85_1: D85.1 R145.1 R148.1 U28.1 | length 345.5
  Top Layer w11.94: R148.1@55926,47232 55952,47206 56031,47206 56068,47243 56132,47243 56157,47218 U28.1@56235,47218
NetD86_1: D86.1 R151.1 | length 74
  Top Layer w11.94: R151.1@55933,47147 D86.1@56007,47147
NetD89_2: D89.2 R165.1 U29.1 | length 151.6
  Top Layer w10.94: D89.2@57035,47058 R165.1@57035,47128 ; D89.2@57043,47060 57075,47060 57091,47044 U29.1@57118,47044
NetD90_2: D90.2 R168.1 U29.2 | length 166.5
  Top Layer w10.94: D90.2@57034,46919 57034,46989 57052,47007 U29.2@57123,47007
NetD91_1: D91.1 R166.1 R167.1 U30.1 | length 316.4
  Top Layer w10.94: R166.1@57541,47125 57567,47099 57654,47099 R167.1@57682,47127 ; R167.1@57692,47133 D91.1@57763,47133 ; D91.1@57775,47109 U30.1@57857,47109
NetD91_2: D91.2 D92.2 U30.2 | length 192.4
  Top Layer w15: D92.2@57686,47041 57689,47044 57730,47044 57740,47054 U30.2@57873,47054
NetD92_1: D92.1 R170.1 | length 70
  Top Layer w10.94: R170.1@57542,47040 D92.1@57612,47040
NetD93_2: D93.2 R171.1 U31.1 | length 135
  Top Layer w11.94: D93.2@57035,47367 R171.1@57035,47430 ; D93.2@57043,47357 U31.1@57115,47357
NetD94_2: D94.2 R174.1 U31.2 | length 144.8
  Top Layer w11.94: D94.2@57037,47221 R174.1@57037,47278 ; R174.1@57042,47290 57073,47321 U31.2@57117,47321
NetD95_1: D95.1 R172.1 R173.1 U32.1 | length 337.5
  Top Layer w10.94: R173.1@57534,47433 57562,47405 57648,47405 57681,47438 57713,47438 57740,47411 U32.1@57835,47411
NetD96_1: D96.1 R176.1 | length 64
  Top Layer w8.94: R176.1@57541,47346 D96.1@57605,47346
NetD98_1: D98.1 R191.2 | length 66
  Top Layer w10: D98.1@55215,47929 R191.2@55281,47929
NetD99_1: D99.1 P30.4 R184.2 | length 311.7
  Top Layer w15: P30.4@54000,49807 54040.5,49766.5 R184.2@54040.5,49597.5 54112.5,49597.5 D99.1@54122,49588
NetD100_1: D100.1 P30.3 R187.2 | length 308.4
  Top Layer w15: R187.2@53811,49597.5 53883,49597.5 D100.1@53892.5,49588 53892.5,49797.5 P30.3@53902,49807
NetD101_1: D101.1 P30.2 R188.2 | length 340
  Top Layer w15: R188.2@53658,49597.5 53730,49597.5 D101.1@53739.5,49588 53739.5,49669.5 53823,49753 P30.2@53823,49808
NetD102_1: D102.1 R197.1 U35.1 | length 180
  Top Layer w10.94: R197.1@56180,48462 56240,48462 ; D102.1@56255,48443 U35.1@56375,48443
NetD103_1: D103.1 R200.1 | length 61
  Top Layer w10.94: R200.1@56038,48378 D103.1@56099,48378
NetD104_1: D104.1 R202.1 U36.1 | length 182
  Top Layer w10.94: 56189,48178 D104.1@56250,48178 ; D104.1@56271,48150 U36.1@56392,48150
NetD105_1: D105.1 R205.1 | length 63
  Top Layer w8.94: R205.1@56046,48084 D105.1@56109,48084
NetD106_1: D106.1 R206.1 U37.1 | length 205
  Top Layer w10.94: R206.1@57686,46841 D106.1@57757,46841 ; D106.1@57770,46816 U37.1@57904,46816
NetD107_1: D107.1 R209.1 | length 71
  Top Layer w10.94: R209.1@57539,46750 D107.1@57610,46750
NetD180_1: D180.1 R28.1 R34.1 U9.1 | length 242
  Top Layer w10: U9.1@51349,48482 51504,48482 R28.1@51516,48494 R34.1@51516,48564
NetF2_1: F2.1 P20.1 | length 214.6
  Top Layer w20: P20.1@52906,48132 52975,48063 F2.1@52975,47946
NetL1_3: L1.3 U2.7 | length 721.5
  Top Layer w10: U2.7@51046,47080 51034,47080 51012,47058 51012,46948 51042,46918 51213.37,46918 51362,46769.37 L1.3@51362,46625
NetL1_4: L1.4 U2.6 | length 695.7
  Top Layer w10: U2.6@51052,46990 51164,46990 51424,46730 51424,46584 51407,46567 L1.4@51361,46567
NetL4_1: L4.1 U6.7 | length 763
  Top Layer w20: U6.7@52054,47092 52038,47092 51990,47044 51990,46976 52038,46928 52234,46928 52360,46802 L4.1@52360,46633
NetL4_2: L4.2 U6.6 | length 741.1
  Top Layer w20: U6.6@52054,46992 52216,46992 52442,46766 52442,46598 52419,46575 L4.2@52360,46575
NetL5_1: L5.1 R58.2 U14.6 | length 462.8
  Top Layer w12: R58.2@57244,49712 57244,49748 57262,49766 57430,49766 57441,49755 L5.1@57441,49716 57441,49697 U14.6@57554,49584
NetL5_2: L5.2 R67.1 U14.7 | length 536.6
  Top Layer w12: L5.2@57383,49716 57383,49655 U14.7@57454,49584 57454,49564 57484,49534 57594,49534 57604,49544 57604,49618 57530,49692 R67.1@57520,49692
NetL6_1: L6.1 U5.10 | length 1237.8
  Top Layer w12: U5.10@56258,49378 56398,49238 56522,49238 56704,49056 56704,48846 56820,48730 57034,48730 57059,48755 L6.1@57059,48790
NetL6_2: L6.2 U5.11 | length 1364.5
  Top Layer w12: U5.11@56158,49378 56158,49420 56168,49430 56304,49430 56310,49424 56310,49360 56382,49288 56510,49288 56724,49074 56724,48851.46 56827.46,48748 56972,48748 57001,48777 L6.2@57001,48790
NetL7_1: L7.1 U5.8 | length 892.4
  Top Layer w12: U5.8@56458,49378 56458,49370.54 56758,49070.54 56758,48842.91 56834.91,48766 56884,48766 56911,48793 L7.1@56911,48830
NetL7_2: L7.2 U5.9 | length 952.5
  Top Layer w12: U5.9@56358,49378 56358,49414 56374,49430 56484,49430 56506,49408 56506,49348 56784,49070 56784,48846 56800,48830 L7.2@56853,48830
NetL8_1: L8.1 U1.10 | length 1251.7
  Top Layer w12: U1.10@54938,49378 54938,49372 55346,48964 55346,48780.54 55424.54,48702 55692,48702 55732.41,48742.41 L8.1@55732.41,48792
NetL8_2: L8.2 U1.11 | length 1385.1
  Top Layer w12: U1.11@54838,49378 54838,49422 54854,49438 54960,49438 54988,49410 54988,49354 55370,48972 55370,48782 55432,48720 55648,48720 55674.41,48746.41 L8.2@55674.41,48792
NetL11_1: L11.1 U1.8 | length 927.3
  Top Layer w12: U1.8@55138,49378 55138,49243.46 55388,48993.46 55388,48790 55440,48738 55542,48738 55557,48753 L11.1@55557,48792
NetL11_2: L11.2 U1.9 | length 999.6
  Top Layer w12: U1.9@55038,49378 55038,49426 55054,49442 55156,49442 55188,49410 55188,49218.91 55406,49000.91 55406,48825.46 55439.46,48792 L11.2@55499,48792
NetP8_2: P8.2 P33.1 | length 208
  Top Layer w20: P33.1@50171,47384 P8.2@50171,47592
NetP9_1: P9.1 P10.1 Q2.3 R56.2 | length 1053.1
  Top Layer w11.94: P9.1@50171,47060 50454,47060 50526,47132 Q2.3@50696,47132
  Top Layer w12.94: R56.2@50673,47203 50696,47180 Q2.3@50696,47148
  Top Layer w20: P9.1@50171,47060 50120,47060 50084,47024 50084,46835 P10.1@50185,46734
NetP14_1: P14.1 T1.4 T1.5 | length 588.2
  Top Layer w20: T1.5@58592,46528 T1.4@58592,46732
  Bottom Layer w20: P14.1@58396,46229 58396,46296 58592,46492 T1.5@58592,46532
NetP33_2: P33.2 R29.2 R35.2 R38.2 R54.2 | length 10014.7
  Top Layer w10: v1(50669,46666) 50424,46421 50424,46206 50518,46112 53950,46112 53976,46138 53976,46230 v1(53898,46308) ; v1@50670,46666 R54.2@50670,46702
  Top Layer w10.94: v1(53898,46584) 54425,46584 v1(54448,46607) ; v1(54447,47221) 54903,47221 54957,47167 v1@55750,47167
  Top Layer w11.94: R38.2@50779,47461 50778,47462 R35.2@50778,47554 50818,47594 50889,47594 R29.2@50918,47565
  Top Layer w20: P33.2@50171,47286 50304,47286 50479,47461 R38.2@50779,47461
  Bottom Layer w10.36: v1@54445,46607 v1@54445,47226
  Bottom Layer w12.36: v1(50669,46666) 50712,46709 50712,47063 v1@50712,47460 ; v1@53898,46304 v1@53898,46582 ; v1(55747,47167) v1@55747,48244
  other v1: 50710,47460 55746,48243
NetQ2_1: Q2.1 R52.1 R53.2 | length 267.4
  Top Layer w10.94: Q2.1@50663,47052 50693,47082 50789,47082 R52.1@50796,47089
  Top Layer w11.94: R52.1@50803,47092 50803,47149 50814,47160 50814,47198 R53.2@50820,47204
NetQ3_1: Q3.1 R54.1 R55.1 | length 199
  Top Layer w10.94: R54.1@50661,46782 R55.1@50792,46782 ; R54.1@50662,46782 Q3.1@50662,46850
NetQ3_3: Q3.3 R51.2 R53.1 | length 688.7
  Top Layer w10.94: Q3.3@50695,46939 50736,46898 50771,46898 R51.2@50804,46865 R51.2@50809,46865 ; R53.1@50820,47268 50872,47268 50922,47218 50922,46922 50856,46856 50824,46856
NetQ4_1: Q4.1 R77.2 R78.1 | length 313.5
  Top Layer w10.94: R77.2@56164,47752 56164,47744 56200,47708 56255,47708 v1(56266,47719)
  Top Layer w13.94: R78.1@56241,47840 Q4.1@56304,47840
  Bottom Layer w12.36: v1(56266,47719) v1@56266,47840
  other v1: 56265,47841
NetQ5_1: Q5.1 R90.2 R93.1 | length 180.7
  Top Layer w9.94: R90.2@57836,47688 57836,47700 R93.1@57910,47774 ; R93.1@57919,47775 Q5.1@57983,47775
NetQ6_1: Q6.1 R100.1 R101.1 | length 162
  Top Layer w12.94: R101.1@56245,46750 Q6.1@56407,46750
NetQ7_1: Q7.1 R137.1 R142.2 | length 229.2
  Top Layer w9.94: R137.1@55769,46707 55788,46688 Q7.1@55827,46688
  Top Layer w11.94: R142.2@55691,46584 55691,46621 55757,46687 R137.1@55757,46720
NetQ7_2: Q7.2 Q8.3 | length 448.3
  Top Layer w12.36: Q8.3@55657,46866 Q8.3@55666,46875 ; Q8.3@55670,46874 v3@55670,46911
  Top Layer w12.94: v1(55809,46613) Q7.2@55849,46613
  Bottom Layer w12.36: v3@55670,46914 55670,46838 55809,46699 v1(55809,46613)
  other v3: 55670,46912
NetQ8_1: Q8.1 R143.1 R144.2 | length 254.8
  Top Layer w10.94: Q8.1@55756,46830 55740,46830 55714,46856 55714,46966 55760,47012 R143.1@55760,47039
NetQ9_1: Q9.1 R157.1 R160.1 | length 131
  Top Layer w12.94: R160.1@55936,47487 Q9.1@56067,47487
NetQ10_1: Q10.1 R158.1 R161.1 | length 121
  Top Layer w9.94: R161.1@56339,47487 Q10.1@56460,47487
NetQ11_1: Q11.1 R163.1 | length 55
  Top Layer w9.94: R163.1@55602,47488 Q11.1@55657,47488
NetQ11_2: Q11.2 Q12.3 | length 269.3
  Top Layer w9.94: Q11.2@55665,47419 Q11.2@55665,47422
  Top Layer w11.94: Q12.3@55508,47456 55490,47438 55490,47410 55516,47384 55634,47384 55668,47418 Q11.2@55678,47418
NetQ11_3: Q11.3 R160.2 R161.2 | length 582.5
  Top Layer w10: R160.2@55925,47420 55925.58,47420 55967.58,47378 56279,47378 R161.2@56324,47423
  Top Layer w12.94: Q11.3@55784,47455 55839,47455 55874,47420 R160.2@55917,47420
NetQ12_1: Q12.1 R164.1 | length 55
  Top Layer w9.94: R164.1@55360,47498 Q12.1@55415,47498